# Altium PCB FAR.PcbDoc
Units mm, origin at the board's own origin, x right, y up, seen from the top; angles counter-clockwise.
Board outline 45 x 44 mm, 2 copper layers (Top Layer, Bottom Layer); 27 components, 34 nets, 152 pads, 37 vias.
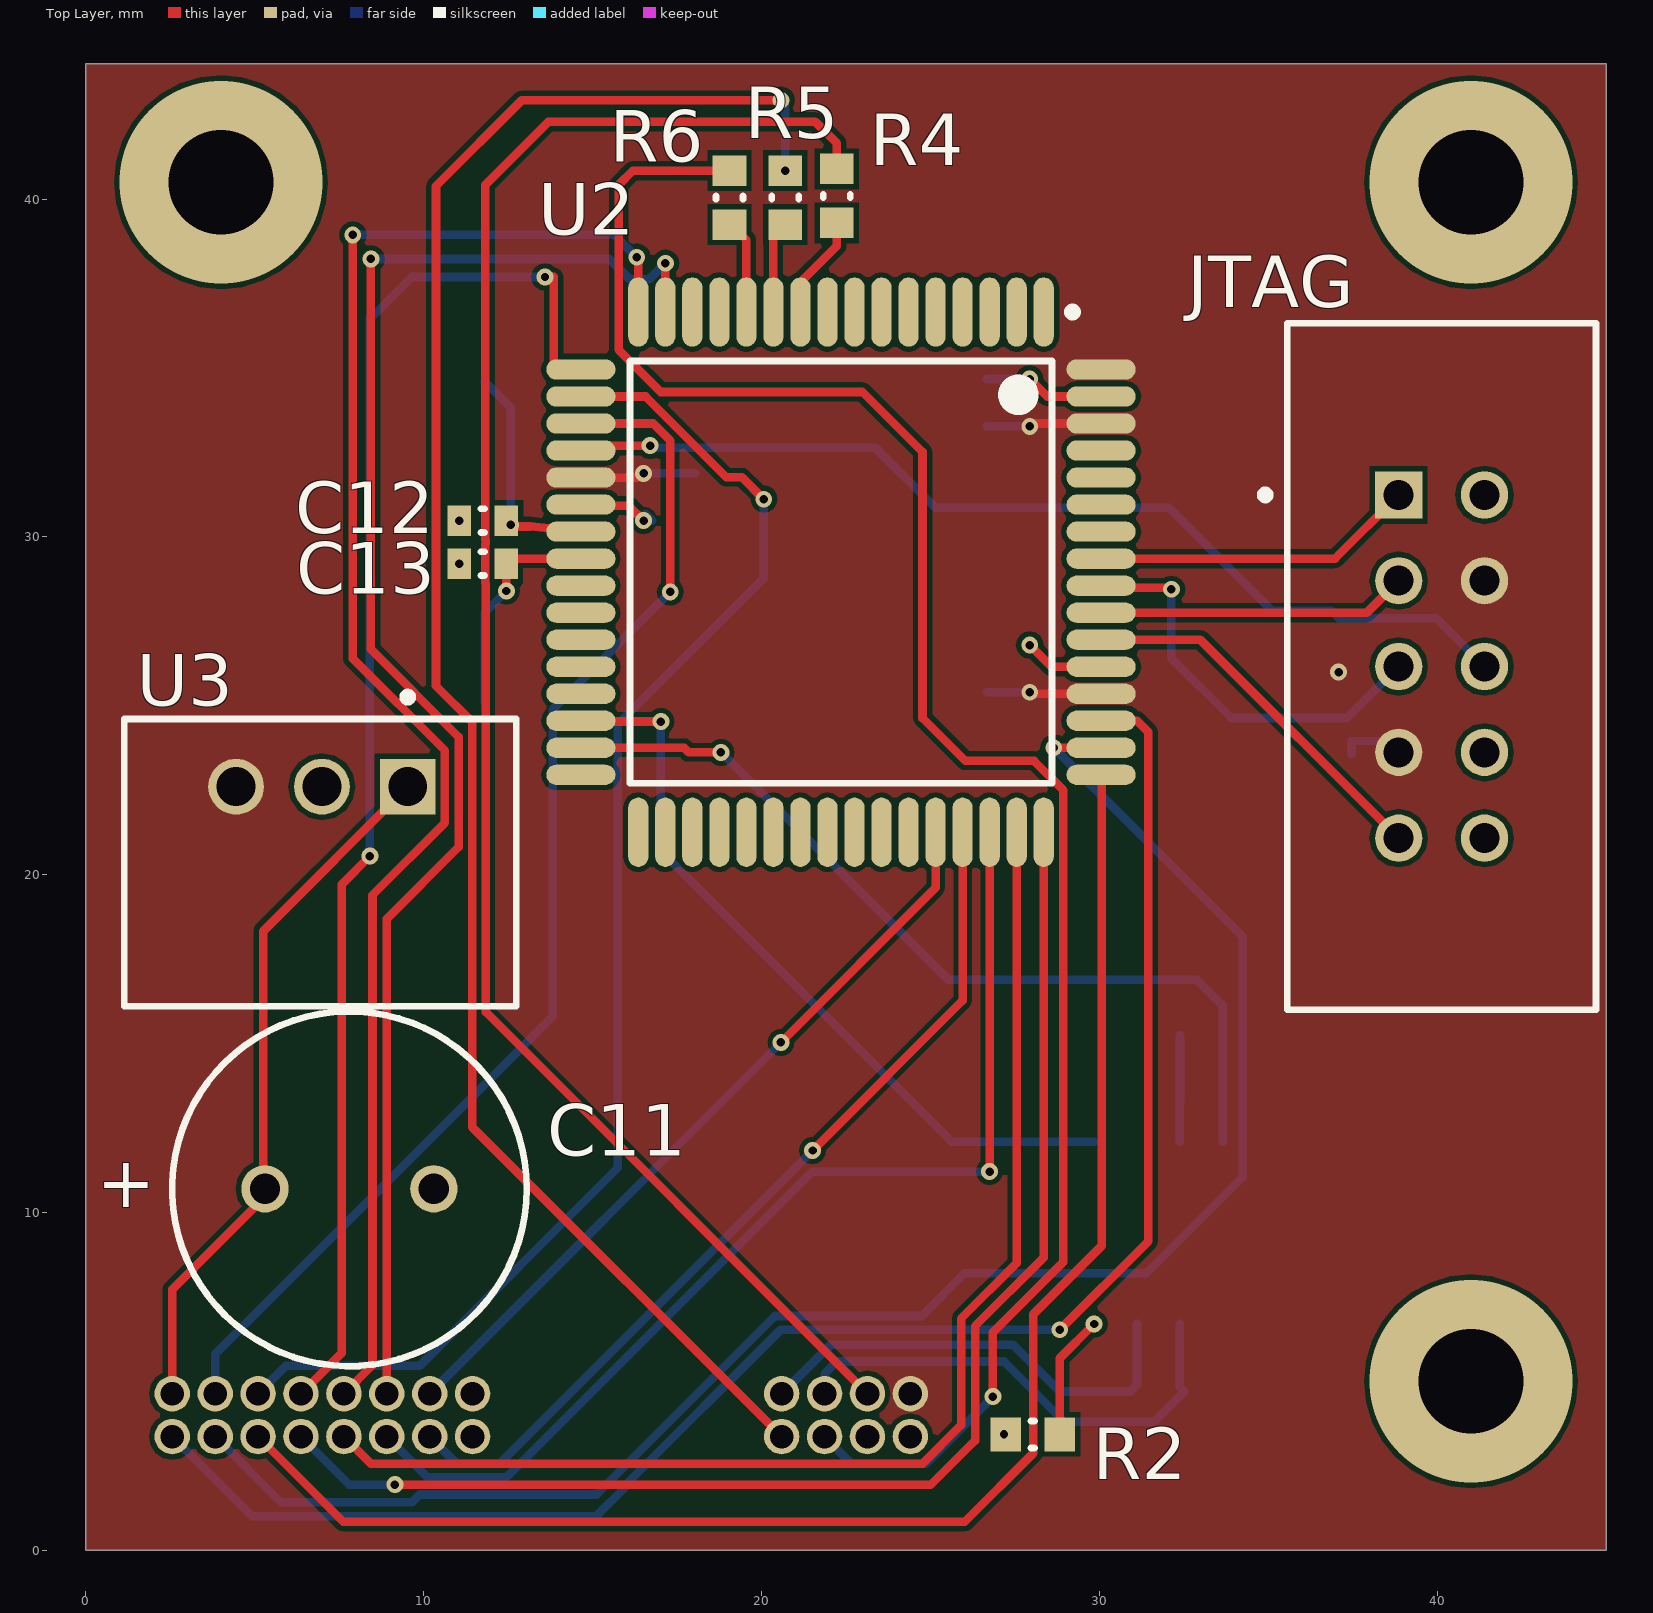
[diagram p0: Top Layer view]
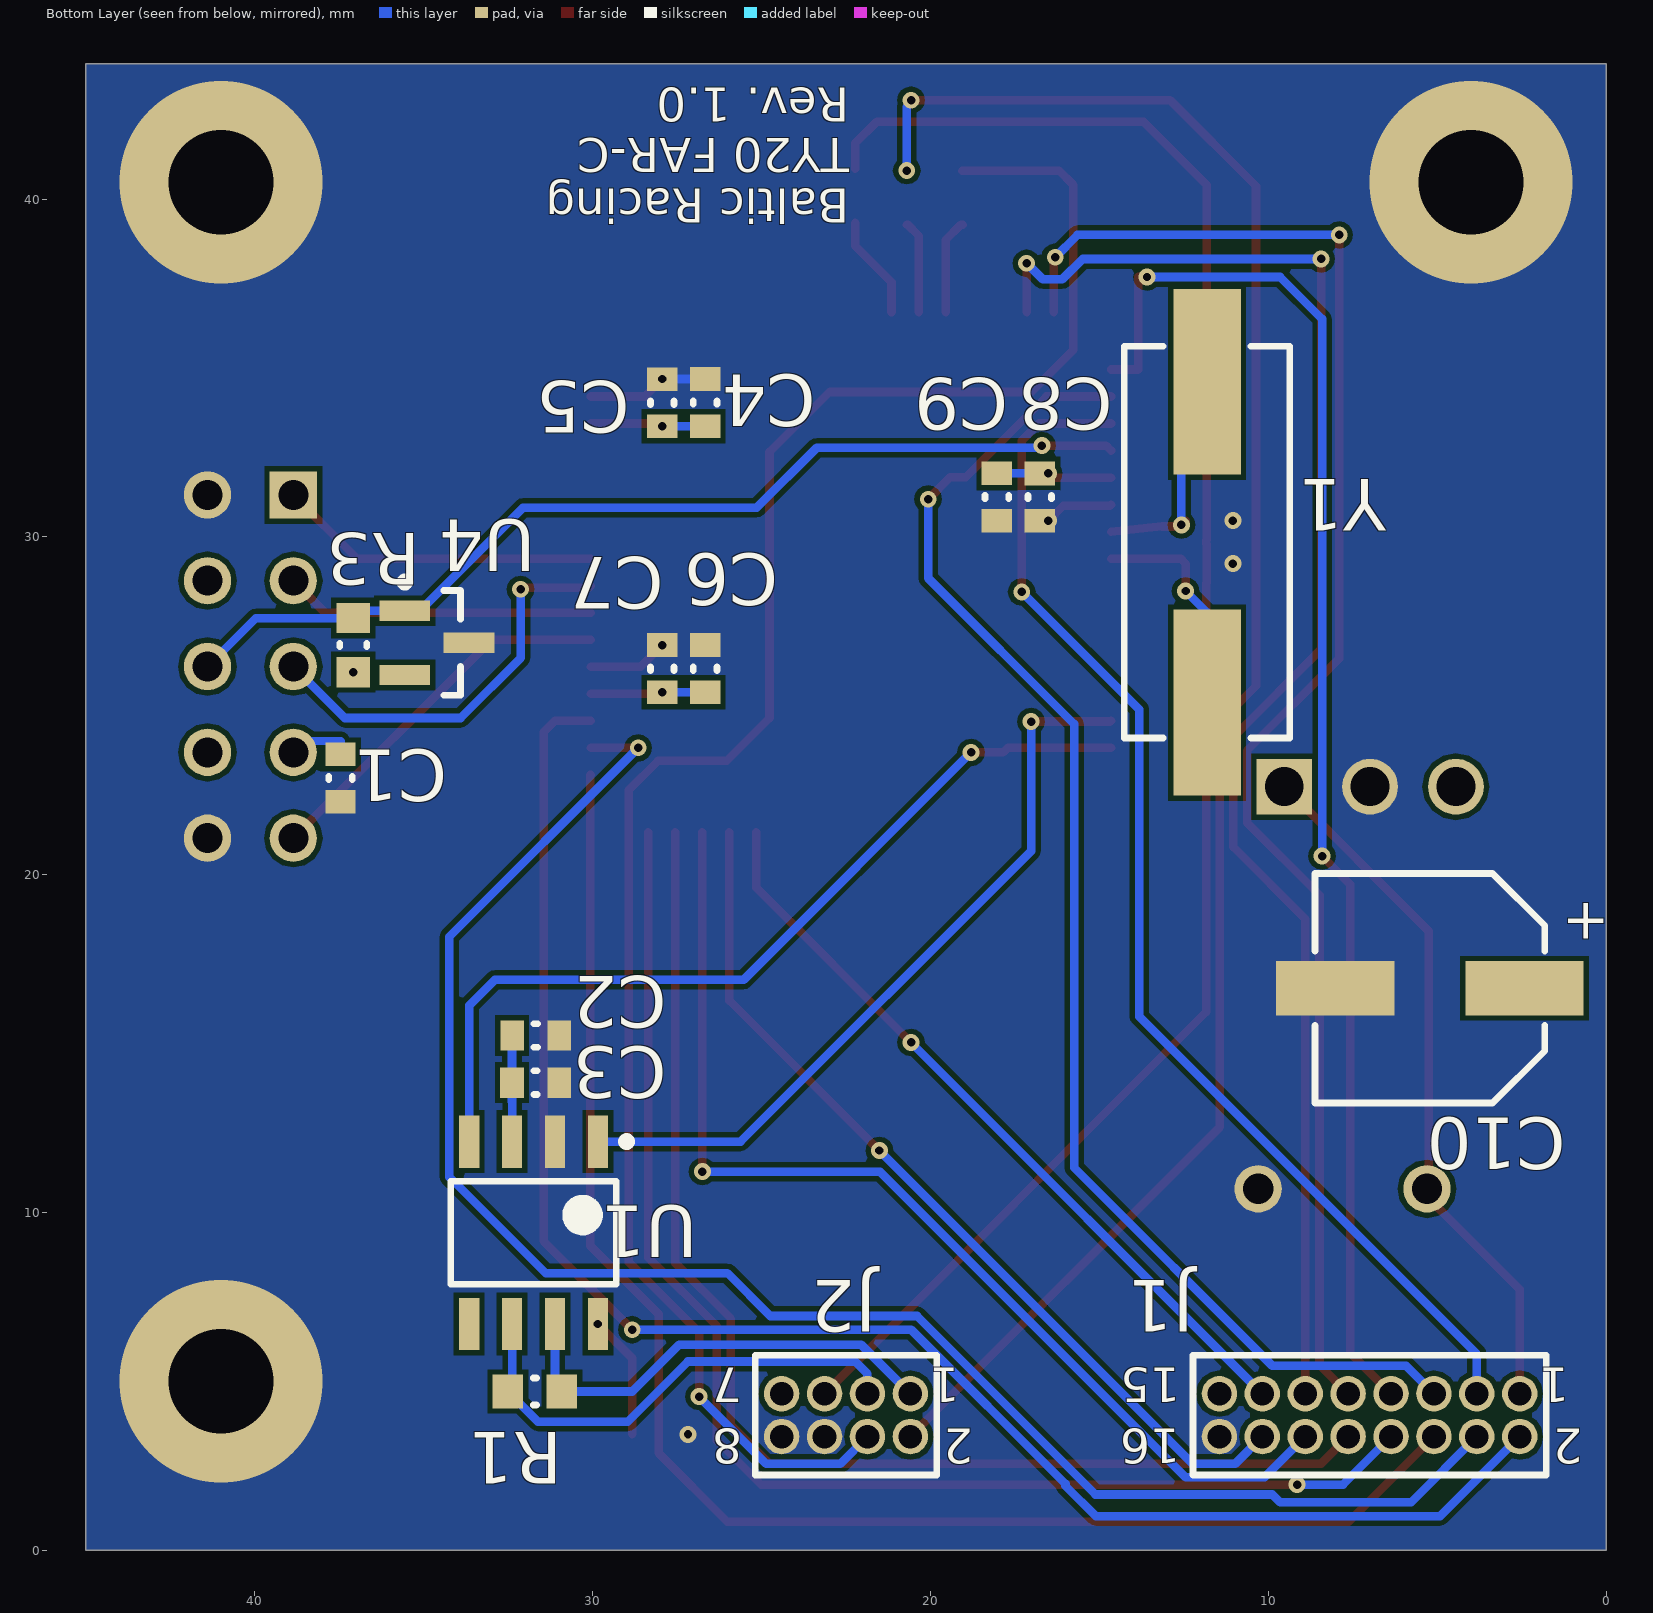
[diagram p1: Bottom Layer view, seen from below]

## Layer stack, top to bottom
Top Solder: solder mask 0.0102, Solder Resist, Dk 3.5
Top Layer: signal copper 0.0356
Dielectric 1: dielectric 0.32, FR-4, Dk 4.8
Bottom Layer: signal copper 0.0356
Bottom Solder: solder mask 0.0102, Solder Resist, Dk 3.5

## Board outline
0,44 45,44 45,0 0,0
cut-out: 45.974,75.692
cut-out: 55.372,36.449

## Design rules (kind name [scope] priority, off if disabled: settings)
Clearance [All] p1: gap=0.15 ignorepadtopadclearanceinfootprint=FALSE
PolygonConnect [All] p1: connectstyle=Direct reliefconductorwidth=0.254 reliefentries=4 polygonreliefangle="90 Angle" airgapwidth=0.254
RoutingVias [All] p1: holewidth=0.25 width=0.5 viastyle="Through Hole" minholewidth=0.2 minwidth=0.45 maxholewidth=0.35 maxwidth=0.6
SilkToSilkClearance [All] p1: silktosilkclearance=0.15
SilkToSolderMaskClearance [IsPad] p1: minsilkscreentomaskgap=0.15 clearancetoexposedcopper=TRUE
SolderMaskExpansion [All] p1: expansion=0.102
Width [All] p1: maxlimit=0.5 minlimit=0.15 preferedwidth=0.254
28 further rules are at their usual default settings.

## Classes and differential pairs
polygon class "Supply layers": "GND Bottom"

## Components (designator, comment, footprint, x,y, rotation, side; value= is the part's Value field where it differs from the comment)
C1 "100nF 0603" CAPC0603(1608)100_L 37.465,22.86 r270 bottom value=100nF
C2 "100nF 0603" CAPC0603(1608)100_L 31.685,15.24 r180 bottom value=100nF
C3 "1µF 0603" CAPC0603(1608)100_L 31.688,13.843 r180 bottom value=100nF
C4 "100nF 0603" CAPC0603(1608)100_L 26.67,33.974 r270 bottom value=100nF
C5 "1µF 0603" CAPC0603(1608)100_L 27.94,33.971 r270 bottom value=100nF
C6 "100nF 0603" CAPC0603(1608)100_L 26.67,26.097 r270 bottom value=100nF
C7 "1µF 0603" CAPC0603(1608)100_L 27.94,26.097 r270 bottom value=100nF
C8 "100nF 0603" CAPC0603(1608)100_L 16.764,31.177 r90 bottom value=100nF
C9 "1µF 0603" CAPC0603(1608)100_L 18.034,31.18 r90 bottom value=100nF
C10 "100uF, 10V" WCAP-ASLU_6.3x7.7 5.213,16.637 r180 bottom
C11 "220uF, 25V" WCAP-ATET_10x12.5 7.8,10.7 r180 top
C12 "16 pF 0603" CAPC0603(1608)100_L 11.746,30.48 r180 top value=100nF
C13 "16 pF 0603" CAPC0603(1608)100_L 11.746,29.21 r180 top value=100nF
J1 "62201621121" 62201621121 7,4 r0 bottom
J2 "62200821121" 62200821121 22.5,4 r0 bottom
JTAG "5103309-1" TECO-5103309-1_V 40.132,26.162 r90 top
R1 "127R 0603" RESC0603(1608)_N 31.712,4.699 r180 bottom value="127.00 Ohm"
R2 "10k 0603" RESC0603(1608)_N 28.029,3.429 r0 top value="127.00 Ohm"
R3 "10k 0603" RESC0603(1608)_N 37.084,26.797 r90 bottom value="127.00 Ohm"
R4 "10k 0603" RESC0603(1608)_N 22.225,40.094 r270 top value="127.00 Ohm"
R5 "10k 0603" RESC0603(1608)_N 20.701,40.043 r270 top value="127.00 Ohm"
R6 "10k 0603" RESC0603(1608)_N 19.05,40.043 r270 top value="127.00 Ohm"
U1 "MCP2551-I/SN" MCHP-SN8_V 31.75,9.398 r270 bottom
U2 "AT90CAN128-16AU" 64A_M 22.352,28.956 r270 top
U3 "R-78E5.0-0.5" REPO-R-78E-0.5-3_V 6.985,22.606 r180 top
U4 "MCP120T-300I/TT" SOT-23-TT3_N 34.61,26.863 r180 bottom
Y1 "16MHz, +/-30ppm, 16pF" WE-XTAL_HC49/4HSMX 11.811,29.845 r90 bottom

## Footprints (in the part's own frame and the unit in brackets; to place one, negate y for a bottom-side part, rotate by r counter-clockwise, add the part's x,y. Pads: shape width x height; smd on the part's side, far side on the other; paste and mask are expansions set on the pad)
64A_M [mm] "Thin QFP, 64-Leads, Body 14x14mm, Pitch 0.8mm, IPC Low Density"
  oval 2.05x0.6 smd: 1(-7.7,6) 2(-7.7,5.2) 3(-7.7,4.4) 4(-7.7,3.6) 5(-7.7,2.8) 6(-7.7,2) 7(-7.7,1.2) 8(-7.7,0.4) 9(-7.7,-0.4) 10(-7.7,-1.2) 11(-7.7,-2) 12(-7.7,-2.8) 13(-7.7,-3.6) 14(-7.7,-4.4) 15(-7.7,-5.2) 16(-7.7,-6) 33(7.7,-6) 34(7.7,-5.2) 35(7.7,-4.4) 36(7.7,-3.6) 37(7.7,-2.8) 38(7.7,-2) 39(7.7,-1.2) 40(7.7,-0.4) 41(7.7,0.4) 42(7.7,1.2) 43(7.7,2) 44(7.7,2.8) 45(7.7,3.6) 46(7.7,4.4) 47(7.7,5.2) 48(7.7,6)
  oval 0.6x2.05 smd: 17(-6,-7.7) 18(-5.2,-7.7) 19(-4.4,-7.7) 20(-3.6,-7.7) 21(-2.8,-7.7) 22(-2,-7.7) 23(-1.2,-7.7) 24(-0.4,-7.7) 25(0.4,-7.7) 26(1.2,-7.7) 27(2,-7.7) 28(2.8,-7.7) 29(3.6,-7.7) 30(4.4,-7.7) 31(5.2,-7.7) 32(6,-7.7) 49(6,7.7) 50(5.2,7.7) 51(4.4,7.7) 52(3.6,7.7) 53(2.8,7.7) 54(2,7.7) 55(1.2,7.7) 56(0.4,7.7) 57(-0.4,7.7) 58(-1.2,7.7) 59(-2,7.7) 60(-2.8,7.7) 61(-3.6,7.7) 62(-4.4,7.7) 63(-5.2,7.7) 64(-6,7.7)
  silkscreen extent -7.82,-6.25 6.25,6.98, body extent -7,-7 7,7, height 1.6
62200821121 [mm] "Pin Header, pitch 1.27 mm, THT, Vertical, dual row, 8p"
  round 1.05 hole 0.7: 1(-1.905,-0.635) 2(-1.905,0.635) 3(-0.635,-0.635) 4(-0.635,0.635) 5(0.635,-0.635) 6(0.635,0.635) 7(1.905,-0.635) 8(1.905,0.635)
  silkscreen extent -2.69,-1.77 2.69,1.78, body extent -2.54,-1.7 2.54,1.7, height 5.33
62201621121 [mm] "Pin Header, pitch 1.27 mm, THT, Vertical, dual row, 16p"
  round 1.05 hole 0.7: 1(-4.445,-0.635) 2(-4.445,0.635) 3(-3.175,-0.635) 4(-3.175,0.635) 5(-1.905,-0.635) 6(-1.905,0.635) 7(-0.635,-0.635) 8(-0.635,0.635) 9(0.635,-0.635) 10(0.635,0.635) 11(1.905,-0.635) 12(1.905,0.635) 13(3.175,-0.635) 14(3.175,0.635) 15(4.445,-0.635) 16(4.445,0.635)
  silkscreen extent -5.23,-1.77 5.23,1.78, body extent -5.08,-1.7 5.08,1.7, height 5.33
CAPC0603(1608)100_L [mm] "Chip Capacitor, Body 1.6x0.8mm, Height 1.0mm, IPC High Density"
  rect 0.7x0.9 smd: 1(-0.7,0) 2(0.7,0)
  silkscreen extent -0.05,-0.35 0.05,0.35, body extent -0.87,-0.47 0.88,0.48, height 1
MCHP-SN8_V [mm] "SOIC, 8-Leads, Body 4.9x3.9mm, Pitch 1.27mm"
  rect 1.55x0.6 smd: 1(-2.7,1.905) 2(-2.7,0.635) 3(-2.7,-0.635) 4(-2.7,-1.905) 5(2.7,-1.905) 6(2.7,-0.635) 7(2.7,0.635) 8(2.7,1.905)
  silkscreen extent -2.82,-2.45 1.53,2.88, body extent -3,-2.45 3,2.45, height 1.75
REPO-R-78E-0.5-3_V [mm] "THD, 3-Leads, Body 11.6x8.5mm, Pitch 2.54mm"
  rect 1.65x1.65 hole 1.15: 1(-2.54,0)
  round 1.65 hole 1.15: 2(0,0) 3(2.54,0)
  silkscreen extent -5.75,-2.77 5.85,6.5, body extent -5.75,-2 5.85,6.5, height 10.4
RESC0603(1608)_N [mm] "Chip Resistor, Body 1.6x0.8mm, IPC Medium Density"
  rect 0.9x1 smd: 1(-0.8,0) 2(0.8,0)
  silkscreen extent -0.05,-0.4 0.05,0.4, body extent -0.85,-0.47 0.85,0.47, height 0.6
SOT-23-TT3_N [mm] "SOT23, 3-Leads, Body 2.9x1.3mm, Pitch 0.95mm, Lead Span 2.4mm, IPC Medium Density"
  rect 1.5x0.6 smd: 1(-0.95,0.95) 2(-0.95,-0.95) 3(0.95,0)
  silkscreen extent -1.07,-1.55 0.7,1.92, body extent -0.7,-1.52 0.7,1.53, height 1.12
TECO-5103309-1_V [mm] "Male Header, 10-Leads, Body 20.32x9.144mm, Pitch 2.54mm"
  rect 1.4x1.4 hole 0.889: 1(5.08,1.27)
  round 1.4 hole 0.889: 2(5.08,-1.27) 3(2.54,1.27) 4(2.54,-1.27) 5(0,1.27) 6(0,-1.27) 7(-2.54,1.27) 8(-2.54,-1.27) 9(-5.08,1.27) 10(-5.08,-1.27)
  silkscreen extent -10.16,-4.57 10.16,5.35, body extent -10.16,-4.57 10.16,4.57, height 9.85
WCAP-ASLU_6.3x7.7 [mm] "Aluminum Electrolytic Capacitors, body diameter 6.3mm"
  rect 3.5x1.6 smd: 1(-2.8,0) 2(2.8,0)
  silkscreen extent -3.4,-3.4 3.4,3.4, body extent -3.65,-3.3 3.65,3.3, height 7.7
WCAP-ATET_10x12.5 [mm] "Aluminum Electrolytic Capacitors, 10x12.5mm"
  round 1.4 hole 0.9: 1(-2.5,0) 2(2.5,0)
  silkscreen extent -5.25,-5.25 5.25,5.25, body extent -4.99,-5 5,5, height 12.76
WE-XTAL_HC49/4HSMX [mm] "Quartz Crystal, size HC49/4HSMX, body 11.4x4.9mm"
  rect 5.5x2 smd: 1(-4.75,0) 2(4.75,0)
  silkscreen extent -5.8,-2.45 5.8,2.45, body extent -6.7,-2.45 6.7,2.45, height 4.3

## Part data
C1 C2 C3 C4 C5 C6 C7 C8 C9 C12 C13: library part CMP-1035-02579-1, "CAP 100nF 10V ±5% 0603 (1608 Metric) Thickness 1mm SMD", Case-EIA=0603, Case-Metric=1608, Rated Voltage="10 V", Tolerance=±5%, Max Thickness="1 mm", Technology=SMT
C10: library part 865090245005, "WCAP-ASLU Aluminium Electrolytic Capacitors, D6.3mm x L7.7mm, 100uF, +/-20%, 10VDC", Capacitance=100uF, Capacitance Tolerance=+/-20%, Leakage Current=2uA, Operating Temperature="-40 to +85degC", Rated Voltage=10VDC, Ripple Current max.=75mA, ComponentLink1Description=Manufacturer, ComponentLink1URL=http://www.we-online.de, ComponentLink2Description=Datasheet, ComponentLink2URL=https://katalog.we-online.com/pbs/datasheet/865090245005.pdf, Diameter=6.3mm, Dissipation Factor=22%, Endurance=1000h, Length=7.7mm, Mounting Technology=SMD, Packaging="Tape and Reel", Part Number=865090245005, Published Date="August 2019", Publisher="Wurth Elektronik", Technical Reference=ASBD077101M010DVCTCA000
C11: library part 860130475006, "WCAP-ATET THT Aluminum Electrolytic Capacitors, D10mm x L12.5mm, 220uF, +/-20%, 25VDC", Capacitance=220uF, Capacitance Tolerance=+/-20%, Leakage Current=55uA, Operating Temperature="-40 to +125degC", Rated Voltage=25VDC, Ripple Current max.=420mA, ComponentLink1Description=Manufacturer, ComponentLink1URL=http://www.we-online.de, ComponentLink2Description=Datasheet, ComponentLink2URL=https://katalog.we-online.com/pbs/datasheet/860130475006.pdf, Diameter=10mm, Dissipation Factor=13%, Endurance=2000h, Length=12.5mm, Mounting Technology=THT, Packaging="Ammo Pack", Part Number=860130475006, Published Date="August 2019", Publisher="Wurth Elektronik", Technical Reference=ATGF125221M025DSPA9B000
J1: library part CMP-1502-00950-1, "THT Vertical Pin Header WR-PHD, Pitch 1.27 mm, Dual Row, 16 pins", Contact Resistance=20mOhm, Manufacturer="Wurth Elektronik", Operating Temperature=-40to105degC, Rated Current=1A, Withstanding Voltage=500VAC, Working Voltage=100VAC, Datasheet URL=https://katalog.we-online.de/em/datasheet/62201621121.pdf, Gender=Male, Manufacturer URL=http://www.we-online.de, Mounting Technology=THT, Orientation=Vertical, Package Reference=62201621121, Packaging=Box, Part Number=62201621121, Pin Number=16, Pitch=1.27mm, Publisher=WurthElektronik, Row Number=Dual
J2: library part CMP-1502-00947-1, "THT Vertical Pin Header WR-PHD, Pitch 1.27 mm, Dual Row, 8 pins", Contact Resistance=20mOhm, Manufacturer="Wurth Elektronik", Operating Temperature=-40to105degC, Rated Current=1A, Withstanding Voltage=500VAC, Working Voltage=100VAC, Datasheet URL=https://katalog.we-online.de/em/datasheet/62200821121.pdf, Gender=Male, Manufacturer URL=http://www.we-online.de, Mounting Technology=THT, Orientation=Vertical, Package Reference=62200821121, Packaging=Box, Part Number=62200821121, Pin Number=8, Pitch=1.27mm, Publisher=WurthElektronik, Row Number=Dual
JTAG: library part CMP-2000-07502-1, "Male Header, Pitch 2.54 mm, 2 x 5 Position, Height 9.855 mm, Tail Length 3.048 mm, -65 to 105 degC, RoHS, Tube", Colour=Black, Current Rating=1A, Flammability Rating=UL94V-0, Insulation Resistance=5GR, Manufacturer="TE Connectivity", Max Operating Temperature=105degC, Min Operating Temperature=-65degC, Package Description="Male Header, Pitch 2.54 mm, 2 x 5 Position, Height 9.855 mm, Tail Length 3.048 mm", Package Quantity=35, Board Standoff=Yes(With), Body Material=Thermoplastic, Connector System=Wire-to-Board, Connector Type=Header, Contact Gender=Male, Contact Material=CopperAlloy, Contact Mating Length=0.24inch, Contact Plating=Gold, Contact Shape=Square, Datasheet URL=http://www.te.com/commerce/DocumentDelivery/DDEController?Action=showdoc&DocId=Customer+Drawing%7F5103309%7FE1%7Fpdf%7FEnglish%7FENG_CD_5103309_E1.pdf%7F5103309-1, Datasheet Version="Rev. E1, 03/2011", Depth=9.14mm, ELV=Compliant, Gender=Male, Height=8.813mm, Housing Colour=Black, Housing Material=PBT, Lead Free=LeadFree, Length=0.8inch, Manufacturer URL=http://www.te.com/, Mating Alignment=Yes(With), Mating Connector Lock=No(Without), Mating Retention=No(Without), Max Current Rating=1A, Mount=ThroughHole, Mounting Technology=ThroughHole, Number of Contacts=10, Number of Positions=10, Number of Rows=2, Orientation=Straight, Package Reference=5103309-1, Packaging=Rail/Tube, Panel Mount Retention=No(Without), PCB Mount Alignment=No(Without), PCB Mounting Orientation=Vertical, PCB Mount Retention=Without, Pitch=2.54mm, REACH SVHC=NoSVHC, RoHSCompliant=True, Row Spacing=2.54mm, Shrouded=Yes(With), Shrouded End Dimension=3.81mm, Termination=ThroughHole, Termination Post Length=0.12inch
R1 R2 R3 R4 R5 R6: library part CMP-1012-00408-1, "127R 0.1W 1% 0603 (1608 Metric)  SMD", Case-EIA=0603, Case-Metric=1608, Power="0.1 W", Tolerance="1 %", Technology=SMT
U1: library part CMP-1721-00003-1, "High-Speed CAN Transceiver, /  1 Mb/s, 4.5 to 5.5 V, 8-Pin SOIC (SN), Industrial Temperature, RoHS, Tube", Manufacturer=Microchip, ComponentLink1Description="Manufacturer URL", ComponentLink1URL=http://www.microchip.com/, ComponentLink2Description=Datasheet, ComponentLink2URL=http://ww1.microchip.com/downloads/en/DeviceDoc/21667f.pdf, ComponentLink3Description="Package Specification", ComponentLink3URL=http://www.microchip.com/stellent/groups/techpub_sg/documents/packagingspec/en012702.pdf, DatasheetVersion="Rev. F, 07/2010", Mounting Technology="Surface Mount", PackageDescription="8-Pin Small Outline Integrated Circuit, Body 4.9 x 3.9 mm, Pitch 1.27 mm", PackageReference=SN8, RoHSCompliant=true
U2: library part CMP-0096-00104-1, "8-bit AVR Microcontroller, 128KB Flash and CAN Controller, 53 GPIO pins, Industrial Grade (-40° to +85°C), 64-pin LQFP, Green", Code_JEDEC=MS-026-AEB, DatasheetVersion="revH, Aug-2008", PackageDescription="64-Pin Plastic Thin Profile Quad Flat Pack, 14 x 14 x 1.0 mm Body, 0.8 mm Pitch (TQFP)", PackageReference=64A, PackageVersion="revB, Oct-2001"
U3: library part CMP-2000-06922-2, "DC/DC-Converter, 5 V Single Output, 500 mA, -40 to 85 degC, 3-Pin THD, RoHS, Tube", Current - Output (Max)=500mA, Manufacturer="Recom Power", Operating Temperature=-40°C~85°C, Package Description="3-Pin Through Hole Device, Body 11.6 x 8.5 mm, Pitch 2.54 mm", Package Reference="SIP Module", Package Version="Rev. 0", Datasheet URL=http://www.recom-power.com/pdf/Innoline/R-78Exx-0.5.pdf, Datasheet Version=01/2017, Efficiency=92%, Manufacturer URL=http://www.recom-power.com/us/americas/home.html, Mounting Technology=ThroughHole, Number of Outputs=1, Packaging=Tube, VIN Max=28V, VIN Min=7V, VOUT=5V
U4: library part CMP-0138-00362-1, "Microcontroller Supervisory Circuit with Open Drain Output, 3-Pin SOT-23, Industrial Temperature, Tape and Reel", Code_IPC=SOT23-3, DatasheetVersion="revD, 2001", PackageDescription="3-Lead Plastic Small Outline Transistor (TT) [SOT-23]", PackageReference=SOT-23-TT3, PackageVersion="revBB, Aug-2009"
Y1: library part 830003237, "WE-XTAL Quartz Crystal, size HC49-4HSMX, 16MHz, +/-30ppm, 16pF", Frequency=16MHz, Frequency Stability=50ppm, Frequency Tolerance=+/-30ppm, Load Capacitance=16pF, Operating Temperature="-10 up to +60degC", ComponentLink1Description=Manufacturer, ComponentLink1URL=http://www.we-online.de, ComponentLink2Description=Datasheet, ComponentLink2URL=https://katalog.we-online.com/pbs/datasheet/830003237.pdf, Mounting Technology=SMT, Packaging="Tape and Reel", Part Number=830003237, Published Date="March 2019", Publisher="Wurth Elektronik", Size=HC49-4HSMX

## Via types
v1: diameter 0.5, hole 0.25, Top Layer to Bottom Layer, 34 vias
v2: diameter 6, hole 3.1, Top Layer to Bottom Layer, 3 vias

## Nets (pads, with @x,y where several pads share a name; then routed paths per layer and width w, separated by ;. In a path a pad name is that pad's centre, name@x,y a point inside that pad or via, vN(x,y) a via of type N, cw(c..) or ccw(c..) an arc to the next point about the centre after c; other vN are vias at no path point)
12V: C11.2 J1.1 U3.1 | length 20.9
  Top Layer w0.254: J1.1 2.555,7.722 5.247,10.414 5.247,18.328 U3.1
Backlight_Fuse: J1.13 U2.44 | length 22.8
  Top Layer w0.254: v1(20.574,15.034) 25.152,19.612 U2.44
  Bottom Layer w0.254: J1.13 v1(20.574,15.034)
CAN_H: J2.1 R1.2 U1.7 | length 13.8
  Bottom Layer w0.254: J2.1@20.595,4.847 J2.1 22.046,6.086 27.442,6.086 28.829,4.699 R1.2 31.115,4.902 U1.7
CAN_L: J2.3 R1.1 U1.6 | length 14.5
  Bottom Layer w0.254: J2.3 21.865,5.228 22.225,5.588 27.178,5.588 28.956,3.81 31.623,3.81 R1.1 32.385,4.826 U1.6
CAN_RXD: U1.4 U2.31 | length 26.2
  Top Layer w0.254: U2.31 17.706,23.756 17.84,23.622 v1(18.796,23.622)
  Bottom Layer w0.254: v1(18.796,23.622) 25.527,16.891 32.893,16.891 33.655,16.129 U1.4
CAN_TXD: U1.1 U2.30 | length 22.6
  Top Layer w0.254: U2.30 14.674,24.534 v1(17.018,24.534)
  Bottom Layer w0.254: v1(17.018,24.534) 17.018,24.511 17.018,20.701 25.621,12.098 U1.1
CMC_Fuse_In: J1.12 U2.46 | length 32.1
  Top Layer w0.254: v1(26.752,11.207) U2.46
  Bottom Layer w0.254: J1.12 10.111,2.159 12.446,2.159 21.494,11.207 v1(26.752,11.207)
Controller_Fuse_In: J1.14 U2.45 | length 26.8
  Top Layer w0.254: v1(21.514,11.834) 25.952,16.272 U2.45
  Bottom Layer w0.254: J1.14 10.977,2.563 12.243,2.563 v1(21.514,11.834)
DCDC_Input_Fuse: J1.3 U2.19 | length 36.7
  Top Layer w0.254: U2.19 16.792,33.356 17.297,32.851 v1(17.297,28.372)
  Bottom Layer w0.254: J1.3 3.825,5.806 13.818,15.799 13.818,24.892 v1(17.297,28.372)
Emu_Fuse: J1.11 U2.15 | length 46.2
  Top Layer w0.254: v1(8.433,38.227) 8.433,26.677 11.031,24.079 11.031,20.815 8.905,18.689 J1.11 ; U2.15 v1(17.152,38.1)
  Bottom Layer w0.254: v1(8.433,38.227) 15.494,38.227 16.097,37.624 16.676,37.624 v1(17.152,38.1)
Fan1_Fuse_In: J1.2 U2.51 | length 49.9
  Top Layer w0.254: v1(28.829,6.528) 31.445,9.144 31.445,24.226 31.115,24.556 U2.51
  Bottom Layer w0.254: J1.2 4.908,1.012 15.109,1.012 16.002,1.905 16.002,1.965 20.565,6.528 v1(28.829,6.528)
Fan1_PWM: J2.2 R5.1 | length 54.7
  Top Layer w0.254: v1(20.574,42.926) 12.903,42.926 10.363,40.386 10.363,25.588 11.435,24.516 11.435,12.525 J2.2
  Bottom Layer w0.254: v1(20.574,42.926) 20.574,42.859 20.701,42.732 v1(20.701,40.843)
Fan1_SGND: C1.2 C2.2 C3.2 C4.1 C5.1 C6.1 C7.1 C8.1 C9.1 C10.1 C11.1 C12.2 C13.2 J1.16 J2.6 J2.8 JTAG.2 JTAG.10 R2.1 U1.2 U2.22 U2.53 U2.63 U3.2 U4.3 | length 8.3
  Top Layer w0.254: U2.22 14.682,30.926 16.064,30.926 v1(16.51,30.48) ; v1(27.94,26.797) 28.581,26.156 U2.53 ; v1@27.94,34.671 28.455,34.156 U2.63
  Bottom Layer w0.254: C8.1@16.558,30.683 C8.1 ; C4.1 v1(27.937,34.674) C5.1
  other v1: 27.178,3.429 11.046,29.21 11.046,30.48
  other v2: 41,5 4,40.5 41,40.5
Fan2_Fuse_In: J1.4 U2.50 | length 51.6
  Top Layer w0.254: v1(28.651,23.756) U2.50
  Bottom Layer w0.254: J1.4 5.774,1.416 9.644,1.416 9.879,1.651 15.113,1.651 20.396,6.934 24.74,6.934 26.01,8.204 31.394,8.204 34.239,11.049 34.239,18.168 v1(28.651,23.756)
Fan2_PWM: J2.4 R6.1 | length 56.5
  Top Layer w0.254: R6.1 16.192,40.843 15.773,40.424 15.773,35.535 17.018,34.29 22.987,34.29 24.765,32.512 24.765,24.638 26.035,23.368 28.067,23.368 28.931,22.504 28.931,8.534 26.848,6.452 v1(26.848,4.547)
  Bottom Layer w0.254: J2.4 22.667,2.563 24.864,2.563 v1(26.848,4.547)
Fuelpump_CTRL: J2.5 R4.1 | length 52.7
  Top Layer w0.254: R4.1 22.225,41.656 21.59,42.291 13.691,42.291 11.819,40.419 11.819,29.915 11.839,29.895 11.839,29.795 11.819,29.775 11.819,28.645 11.839,28.625 11.839,15.931 J2.5
Fuelpump_Fuse_In: J1.10 U2.47 | length 37.3
  Top Layer w0.254: J1.10 8.437,2.563 24.765,2.563 25.908,3.706 25.908,6.858 27.552,8.502 U2.47
Ignition_Fuse_In: J1.6 U2.49 | length 45.8
  Top Layer w0.254: J1.6 7.622,0.838 26.01,0.838 28.042,2.87 28.042,6.985 30.074,9.017 30.074,22.956 U2.49
Injection_Fuse_In: J1.8 U2.48 | length 39.9
  Top Layer w0.254: v1(9.144,1.943) 25.014,1.943 26.321,3.25 26.321,6.636 28.352,8.667 U2.48
  Bottom Layer w0.254: J1.8 7.787,1.943 v1(9.144,1.943)
JTAG_TCK: JTAG.1 U2.57 | length 9.6
  Top Layer w0.254: U2.57 36.976,29.356 JTAG.1
JTAG_TDI: JTAG.9 U2.54 | length 11.2
  Top Layer w0.254: U2.54 32.988,26.956 JTAG.9
JTAG_TDO: JTAG.3 U2.55 | length 9.2
  Top Layer w0.254: U2.55 37.916,27.756 JTAG.3
JTAG_TMS: JTAG.5 U2.56 | length 12.3
  Top Layer w0.254: U2.56 30.113,28.495 v1@32.084,28.495
  Bottom Layer w0.254: v1@32.084,28.495 v1(32.131,28.448) 32.131,26.416 33.909,24.638 37.338,24.638 JTAG.5
NetC12_1: C12.1 U2.23 Y1.2 | length 6.8
  Top Layer w0.254: C12.1 v1(12.573,30.353) 12.618,30.308 13.153,30.308 U2.23
  Bottom Layer w0.254: Y1.2 12.573,33.833 v1(12.573,30.353)
NetC13_1: C13.1 U2.24 Y1.1 | length 6.6
  Top Layer w0.254: v1(12.446,28.397) C13.1 12.592,29.356 U2.24
  Bottom Layer w0.254: Y1.1 11.811,27.762 v1(12.446,28.397)
NetR2_2: R2.2 U1.8 | length 3.7
  Top Layer w0.254: R2.2 28.829,5.682 v1(29.845,6.698)
NetR4_2: R4.2 U2.10 | length 3.1
  Top Layer w0.254: U2.10 21.152,37.535 22.225,38.608 R4.2
NetR5_2: R5.2 U2.11 | length 2.7
  Top Layer w0.254: U2.11 20.352,38.92 20.675,39.243 R5.2
NetR6_2: R6.2 U2.12 | length 2.8
  Top Layer w0.254: R6.2 19.1,39.243 19.552,38.791 U2.12
RST: JTAG.6 R3.2 U2.20 U4.1 | length 29.5
  Top Layer w0.254: U2.20 14.798,32.703 v1(16.7,32.703)
  Bottom Layer w0.254: v1(16.7,32.703) 16.764,32.639 23.368,32.639 25.146,30.861 32.062,30.861 32.537,30.386 35.11,27.813 U4.1 36.868,27.813 R3.2 39.967,27.597 JTAG.6
Servo1_Fuse: J1.5 U2.18 | length 41.7
  Top Layer w0.254: U2.18 16.564,34.156 18.951,31.769 19.412,31.769 v1(20.066,31.115)
  Bottom Layer w0.254: J1.5 5.921,5.461 9.881,5.461 15.748,11.328 15.748,24.46 20.066,28.778 v1(20.066,31.115)
Servo2_Fuse: J1.7 U2.17 | length 42.2
  Top Layer w0.254: J1.7 7.569,5.839 7.569,19.71 v1(8.407,20.549) ; v1(13.589,37.694) 13.843,37.694 13.843,34.956 U2.17
  Bottom Layer w0.254: v1(8.407,20.549) 8.407,36.449 9.652,37.694 v1(13.589,37.694)
Servo3_Fuse: J1.9 U2.16 | length 47
  Top Layer w0.254: J1.9 8.484,5.484 8.484,19.396 10.627,21.539 10.627,23.673 7.899,26.4 v1(7.899,38.938) ; v1(16.307,38.278) 16.352,38.233 U2.16
  Bottom Layer w0.254: v1(7.899,38.938) 15.646,38.938 v1(16.307,38.278)
VDD: C1.1 C2.1 C3.1 C4.2 C5.2 C6.2 C7.2 C8.2 C9.2 C10.2 J2.7 JTAG.4 JTAG.7 R3.1 U1.3 U2.21 U2.52 U2.62 U2.64 U3.3 U4.2 | length 15.5
  Top Layer w0.254: U2.21 16.322,31.756 16.443,31.877 v1(16.51,31.877) ; v1@27.94,25.397 27.94,25.381 27.965,25.356 U2.52 ; v1(27.94,33.271) 28.025,33.356 U2.62
  Bottom Layer w0.254: C8.2@16.767,31.88 C9.2 ; C6.2 C7.2@27.937,25.397 ; C4.2 27.937,33.274 v1(27.94,33.271) ; C7.2 C7.2@27.937,25.397 ; v1(27.94,25.4) C7.2@27.937,25.397 ; U1.3 32.385,13.281 ; C1.1 37.465,23.952 JTAG.7@38.858,23.968 ; 32.385,13.281 32.385,13.84 C3.1 ; 32.385,13.281 32.388,13.284 C3.1 ; C3.1@32.387,13.845 C2.1@32.387,15.238 ; C3.1@32.387,13.844 C3.1 ; C3.1@32.387,13.845 C3.1 ; C2.1@32.387,15.238 C2.1 C2.1@32.387,15.239
  other v1: 37.084,25.997
pads on no net: J1.15 JTAG.8 U1.5 U2.1 U2.2 U2.3 U2.4 U2.5 U2.6 U2.7 U2.8 U2.9 U2.13 U2.14 U2.25 U2.26 U2.27 U2.28 U2.29 U2.32 U2.33 U2.34 U2.35 U2.36 U2.37 U2.38 U2.39 U2.40 U2.41 U2.42 U2.43 U2.58 U2.59 U2.60 U2.61

## Polygon pours and split planes (outlines as drawn)
Fan1_SGND on Bottom Layer "GND Bottom" (solid, remove dead copper, pour order 25): 0,0 0,44 45,44 45,0
VDD on Top Layer "NONET_L01_P024" (solid, remove dead copper, pour order 24): 0,0 0,44 45,44 45,0

## Silkscreen, mask and mechanical layers (free items; w line width, h text height)
Bottom Overlay:
  text "Baltic Racing / TY20 FAR-C / Rev. 1.0" at 22.4,43.3 h1 r180

## Text inside footprints (layer, text, board x,y; h text height)
C10: Bottom Overlay "+" at 1.3,18.1 h1.22
C11: Top Overlay "+" at 2.045,11.462 h1.5 r180
J1: Bottom Overlay "1" at 1.09,5.4 h1.02 r180; Bottom Overlay "2" at 0.69,3.6 h1.02 r180; Bottom Overlay "16" at 12.61,3.6 h1.02 r180; Bottom Overlay "15" at 12.61,5.4 h1.02 r180
J2: Bottom Overlay "2" at 18.73,3.6 h1.02 r180; Bottom Overlay "1" at 19.13,5.4 h1.02 r180; Bottom Overlay "8" at 25.57,3.6 h1.02 r180; Bottom Overlay "7" at 25.57,5.4 h1.02 r180